# Altium PCB Main.PcbDoc
Units mil, origin at the board's own origin, x right, y up, seen from the top; angles counter-clockwise.
Board outline 3135 x 1700 mil, 2 copper layers (Top Layer, Bottom Layer); 29 components, 19 nets, 145 pads, 1 vias.
Unrouted connection lines stored in the file: 70.
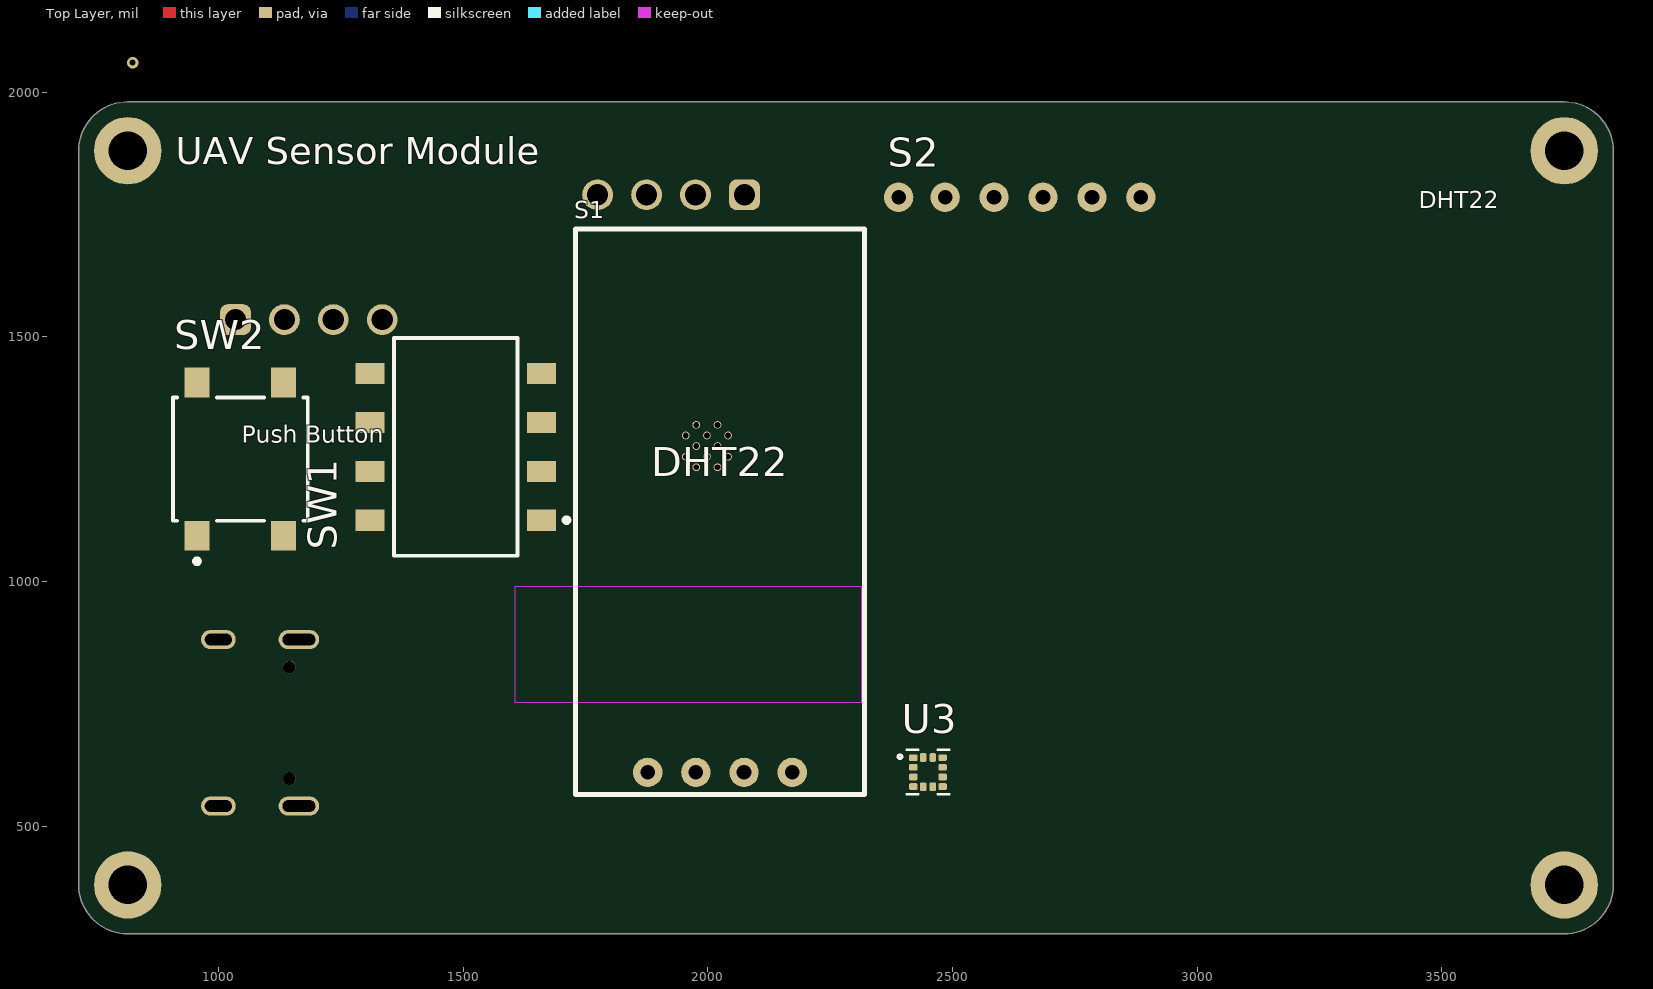
[diagram p0: Top Layer view]
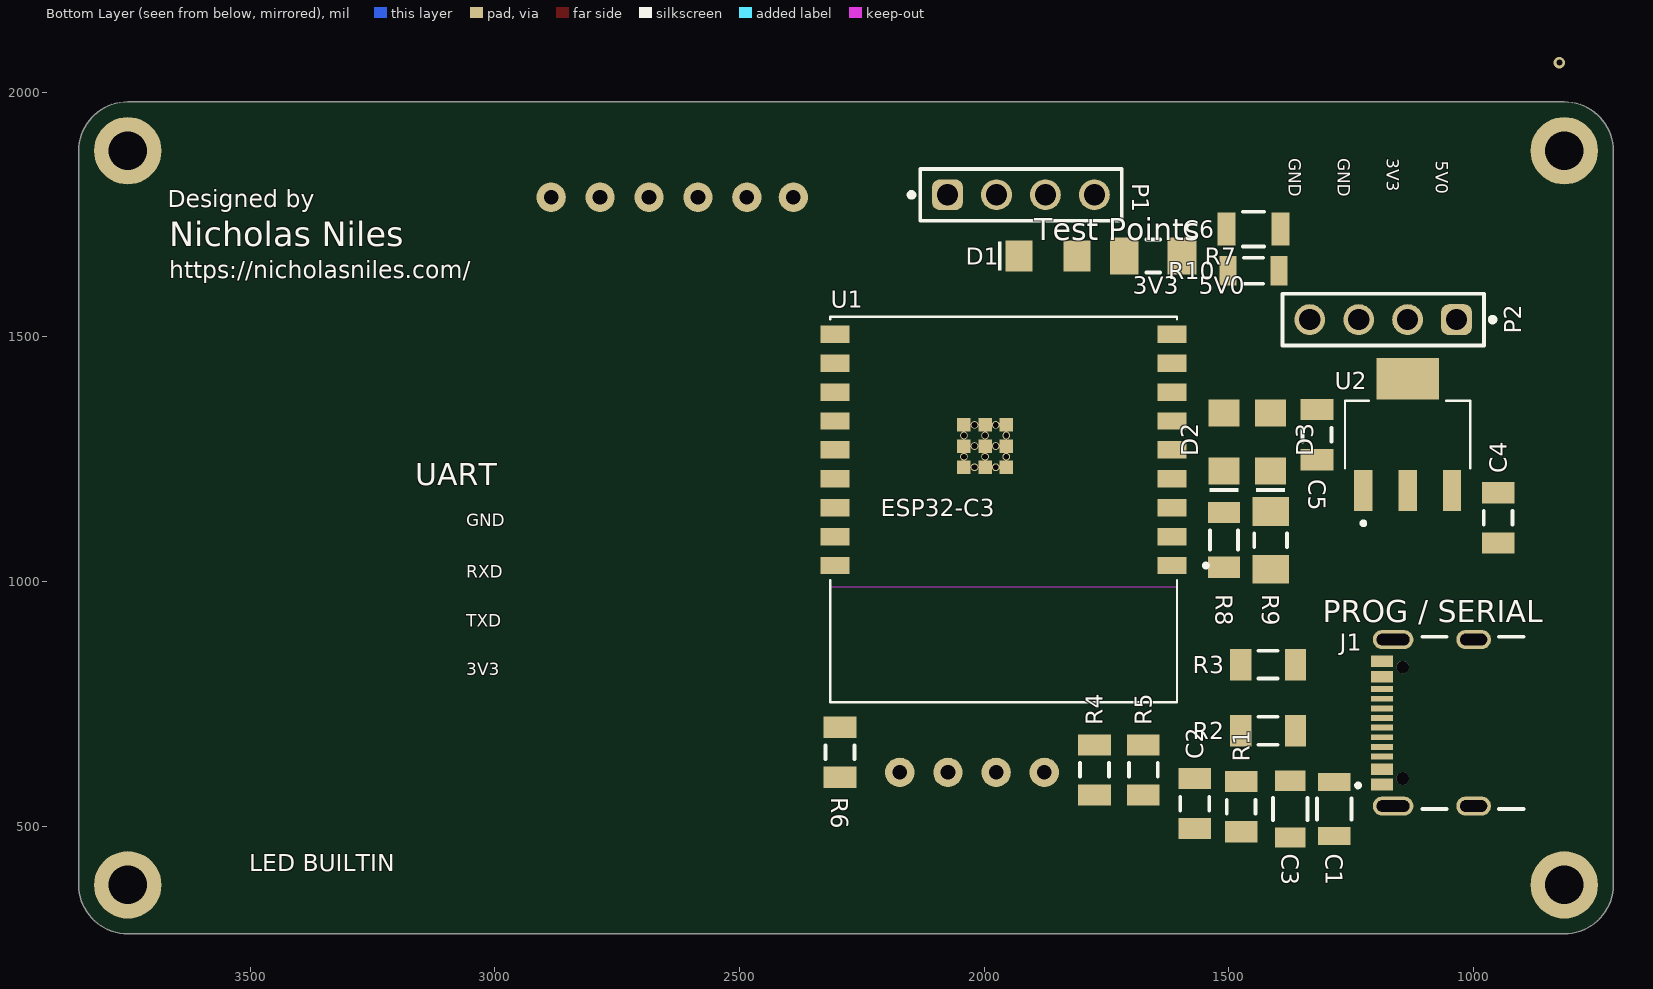
[diagram p1: Bottom Layer view, seen from below]

## Layer stack, top to bottom
Top Solder: solder mask 0.4, Solder Resist, Dk 3.5
Top Layer: signal copper 1.4
Dielectric 1: dielectric 12.6, FR-4, Dk 4.8
Bottom Layer: signal copper 1.4
Bottom Solder: solder mask 0.4, Solder Resist, Dk 3.5

## Board outline
715,380 715,1880 cw(c815,1880) 815,1980 3750,1980 cw(c3750,1880) 3850,1880 3850,380 cw(c3750,380) 3750,280 815,280 cw(c815,380)

## Design rules (kind name [scope] priority, off if disabled: settings)
BoardOutlineClearance [All] p1: gap=7.87 ignorepadtopadclearanceinfootprint=FALSE
Clearance [All] p1: gap=5 ignorepadtopadclearanceinfootprint=TRUE except(10: Arc-Hole Track-Hole SMDPad-Hole THPad-Hole Via-Hole Fill-Hole Poly-Hole Region-Hole Text-Hole)
ComponentClearance [All] p1: gap=5 collisioncheckmode=3 verticalgap=5 showdistances=TRUE
DiffPairsRouting [All] p1: maxlimit=10 minlimit=5 mostfreqgap=5 toplayer_minwidth=5 toplayer_maxwidth=1000 toplayer_prefwidth=5 bottomlayer_minwidth=5 bottomlayer_maxwidth=1000 bottomlayer_prefwidth=5 maxuncoupledlength=500
Height [All] p1: minheight=0 maxheight=71497.94 prefheight=500
HoleSize [All] p1: absolutevalues=TRUE maxlimit=248.03 minlimit=11.81 maxpercent=80.000 minpercent=20.000
HoleToHoleClearance [All] p1: gap=10 allowstackedmicrovias=FALSE
MinimumAnnularRing [All] p1: minimumring=6
MinimumSolderMaskSliver [All] p1: minsoldermaskwidth=6
PlaneClearance [All] p1: clearance=5
PlaneConnect PlaneConnectPowerPads [InPadClass('PowerPads')] p1: planeconnectstyle=Direct reliefexpansion=20 reliefentries=4 reliefconductorwidth=10 reliefairgap=10
PlaneConnect [All] p2: pad.planeconnectstyle=Relief pad.reliefexpansion=11.81 pad.reliefentries=4 pad.reliefconductorwidth=5 pad.reliefairgap=5 via.planeconnectstyle=Direct via.reliefexpansion=11.81 via.reliefentries=4 via.reliefconductorwidth=5 via.reliefairgap=5
PolygonConnect PolygonConnectPowerPads [All vs (InPadClass('PowerPads'))] p1: connectstyle=Direct reliefconductorwidth=10 reliefentries=4 polygonreliefangle="90 Angle" airgapwidth=10
PolygonConnect [All] p2: thpad.connectstyle=Relief thpad.reliefconductorwidth=5 thpad.reliefentries=4 thpad.polygonreliefangle="90 Angle" thpad.airgapwidth=5 smdpad.connectstyle=Relief smdpad.reliefconductorwidth=5 smdpad.reliefentries=4 smdpad.polygonreliefangle="90 Angle" smdpad.airgapwidth=5 via.connectstyle=Direct via.reliefconductorwidth=5 via.reliefentries=4 via.polygonreliefangle="90 Angle" via.airgapwidth=5
RoutingVias [All] p1: holewidth=11.81 width=23.62 viastyle="Through Hole" minholewidth=11.81 minwidth=23.62 maxholewidth=23.62 maxwidth=259.84
SilkToSilkClearance [All] p1: silktosilkclearance=5
SilkToSolderMaskClearance [IsPad] p1: minsilkscreentomaskgap=5 clearancetoexposedcopper=TRUE
SolderMaskExpansion [All] p1: expansion=2 istentingtop=FALSE
SupplyNets "Schematic Supply Nets_2" [InNet('GND')] p1: voltage=0.000
SupplyNets "Schematic Supply Nets_1" [InNet('5V0')] p2: voltage=0.000
SupplyNets "Schematic Supply Nets" [InNet('3V3')] p3: voltage=0.000
UnRoutedNet [All] p1: checkbadconnections=TRUE
Width Width_10mil [All] p1: maxlimit=1000 minlimit=10 preferedwidth=10 minimp=50.000000 maximp=50.000000 favimp=50.000000
Width Width_6mil [All] p2: maxlimit=1000 minlimit=6 preferedwidth=6 minimp=50.000000 maximp=50.000000 favimp=50.000000
Width Power_20mil [All] p3: maxlimit=1000 minlimit=20 preferedwidth=20 minimp=50.000000 maximp=50.000000 favimp=50.000000
Width Power_12mil [All] p4: maxlimit=1000 minlimit=12 preferedwidth=12 minimp=50.000000 maximp=50.000000 favimp=50.000000
Width Width_5mil [All] p5: maxlimit=1000 minlimit=5 preferedwidth=5 minimp=50.000000 maximp=50.000000 favimp=50.000000
19 further rules are at their usual default settings.

## Components (designator, comment, footprint, x,y, rotation, side; value= is the part's Value field where it differs from the comment)
C1 "0.1µF" FP-C1206C-EB-MFG 1285,535 r270 bottom value="0.10 μF"
C2 "1µF" CAPC3216X110X50LL20T25 1570,546.18 r270 bottom
C3 "10µF" FP-GRM31C-0_2-e0_3_0_8-MFG 1375,535 r270 bottom
C4 "1µF" CAPC3216X110X50LL20T25 950,1130 r90 bottom
C5 "1µF" CAPC3216X110X50LL20T25 1320,1300 r90 bottom
C6 "0.1µF" FP-C1206C-EB-MFG 1450,1720 r180 bottom value="0.10 μF"
D1 "150120SS75000" WL-SMCW_1206_150120xx75000 1870,1665 r180 bottom
D2 "150120GS75000" WL-SMCW_1206_150120xx75000 1510,1285 r90 bottom
D3 "150120GS75000" WL-SMCW_1206_150120xx75000 1415,1285 r90 bottom
J1 "USB4105-GF-A" GCT_USB4105-GF-A 1000.12,711.22 r90 bottom
P1 "61300411121" 61300411121 1925,1790 r180 bottom
P2 "61300411121" 61300411121 1185,1535 r0 bottom
R1 "10kΩ" RESC3216X70X50LL20T25 1475,540 r270 bottom
R2 "5.1kΩ" RESC3216X70X50NL05T20 1420,695 r180 bottom
R3 "5.1kΩ" RESC3216X70X50NL05T20 1420,830 r0 bottom
R4 "10kΩ" RESC3216X70X50LL20T25 1775,615 r90 bottom
R5 "10kΩ" RESC3216X70X50LL20T25 1675,615 r90 bottom
R6 "10kΩ" RESC3216X70X50LL20T25 2295,651.18 r270 bottom
R7 "220Ω" RESC3216X70X50ML20T25 1655,1665 r0 bottom
R8 "330Ω" RESC3216X70X50NL05T20 1510,1085 r270 bottom
R9 "220Ω" RESC3216X70X50ML20T25 1415,1084.06 r270 bottom
R10 "4.7k" RESC3216X70X50LL05T20 1450,1635 r180 bottom
S1 "DHT22" DHT22_Footprint 2025,610 r0 top
S2 "Altimeter" altimeter_footprint 2685,1785 r180 top
SW1 "A6S-4102-PH" FP-A6S-4102-PH-MFG 1485,1275 r90 top
SW2 "B3S-1000P" FP-B3S-1000P-MFG 1045,1250 r90 top
U1 "ESP32-C3-WROOM-02-N4" MODULE_ESP32-C3-WROOM-02-H4 1960.51,1146.77 r0 bottom
U2 "TLV1117LV33DCYR" VREG_TLV1117LV33DCYR 1135,1300 r90 bottom
U3 "LIS2HH12TR" PQFN50P200X200X100-12N 2449.92,610.47 r0 top

## Footprints (in the part's own frame and the unit in brackets; to place one, negate y for a bottom-side part, rotate by r counter-clockwise, add the part's x,y. Pads: shape width x height; smd on the part's side, far side on the other; paste and mask are expansions set on the pad)
61300411121 [mm] "Pin Header, pitch 2.54 mm, THT, Vertical, single row, 4p"
  rrect50% 1.6x1.6 hole 1.1: 1(-3.81,0)
  round 1.6 hole 1.1: 2(-1.27,0) 3(1.27,0) 4(3.81,0)
  silkscreen extent -5.8,-1.35 5.23,1.35, body extent -5.08,-1.27 5.08,1.27, height 8.57
altimeter_footprint [mil]
  round 60 hole 30: 1(-200,0) 2(-100,0) 3(0,0) 4(100,0) 5(200,0) 6(295,0)
CAPC3216X110X50LL20T25 [mm] "Chip Capacitor, 2-Leads, Body 3.20x1.60mm, IPC High Density"
  rect 1.1x1.7 smd: 1(-1.3,0) 2(1.3,0)
  silkscreen extent -0.35,-0.75 0.35,0.75, body extent -1.7,-0.9 1.7,0.9, height 1.1
DHT22_Footprint [mil]
  round 60 hole 30: 1(-147.64,0) 2(-49.21,0) 3(49.21,0) 4(147.64,0)
  silkscreen extent -295,-45 295,1111, body extent -297,122 297,1110, height 303
FP-A6S-4102-PH-MFG [mm]
  rect 1.1x1.5 smd paste+0 mask+0: 1(-3.81,-4.45) 2(-1.27,-4.45) 3(1.27,-4.45) 4(3.81,-4.45) 5(3.81,4.45) 6(1.27,4.45) 7(-1.27,4.45) 8(-3.81,4.45)
  silkscreen extent -5.65,-5.88 5.65,3.2, body extent -5.75,-5.3 5.75,5.3, height 0.25
FP-B3S-1000P-MFG [mm]
  rect 1.55x1.3 smd paste+0 mask+0: 1(-3.975,2.25) 2(3.975,2.25) 3(-3.975,-2.25) 4(3.975,-2.25)
  silkscreen extent -5.42,-3.5 3.2,3.5, body extent -4.85,-3.6 4.85,3.6, height 0.25
FP-C1206C-EB-MFG [mm]
  rect 0.95x1.7 smd paste+0 mask+0: 1(-1.4,0) 2(1.4,0)
  silkscreen extent -0.55,-0.9 0.55,0.9, body extent -1.6,-0.8 1.6,0.8, height 0.88
FP-GRM31C-0_2-e0_3_0_8-MFG [mm]
  rect 1.05x1.6 smd paste+0 mask+0: 1(-1.475,0) 2(1.475,0)
  silkscreen extent -0.58,-0.9 0.58,0.9, body extent -1.6,-0.8 1.6,0.8, height 1.8
GCT_USB4105-GF-A [mm]
  rect 0.6x1.15 smd mask+0.05: A1_B12(-3.2,4.755) A4_B9(-2.4,4.755) B1_A12(3.2,4.755) B4_A9(2.4,4.755)
  rect 0.3x1.15 smd mask+0.05: A5(-1.25,4.755) A6(-0.25,4.755) A7(0.25,4.755) A8(1.25,4.755) B5(1.75,4.755) B6(0.75,4.755) B7(-0.75,4.755) B8(-1.75,4.755)
  oval 1x2.1 hole 0.6 slot 1.7 at 90 deg: SH1(-4.32,4.18) SH2(4.32,4.18)
  oval 1x1.8 hole 0.6 slot 1.4 at 90 deg: SH3(-4.32,0) SH4(4.32,0)
  round 0.65 hole 0.65 unplated: ""(-2.89,3.68) ""(2.89,3.68)
  silkscreen extent -4.47,-2.6 4.47,6.1
MODULE_ESP32-C3-WROOM-02-H4 [mm]
  rect 1.5x0.9 smd: 1(-8.75,2.9) 2(-8.75,1.4) 3(-8.75,-0.1) 4(-8.75,-1.6) 5(-8.75,-3.1) 6(-8.75,-4.6) 7(-8.75,-6.1) 8(-8.75,-7.6) 9(-8.75,-9.1) 10(8.75,-9.1) 11(8.75,-7.6) 12(8.75,-6.1) 13(8.75,-4.6) 14(8.75,-3.1) 15(8.75,-1.6) 16(8.75,-0.1) 17(8.75,1.4) 18(8.75,2.9)
  rect 0.7x0.7 smd: 19(-0.14,-2.2) 20(0.96,-2.2) 21(2.06,-2.2) 22(-0.14,-3.3) 23(0.96,-3.3) 24(2.06,-3.3) 25(-0.14,-4.4) 26(0.96,-4.4) 27(2.06,-4.4)
  round 0.4 hole 0.3 mask+0: 28(0.41,-2.2) 29(1.51,-2.2) 30(-0.14,-2.75) 31(0.96,-2.75) 32(2.06,-2.75) 33(0.41,-3.3) 34(1.51,-3.3) 35(-0.14,-3.85) 36(0.96,-3.85) 37(2.06,-3.85) 38(0.41,-4.4) 39(1.51,-4.4)
  Keep-Out Layer region: 9,4 -9,4 -9,10 9,10
  Keep-Out Layer region: 9,4 -9,4 -9,10 9,10
  silkscreen extent -10.6,-10 9,10, body extent -9,-10 9,10, height 3.35
PQFN50P200X200X100-12N [mm]
  rrect50% 0.45x0.35 smd: 1(-0.76,0.75) 2(-0.76,0.25) 3(-0.76,-0.25) 4(-0.76,-0.75) 7(0.76,-0.75) 8(0.76,-0.25) 9(0.76,0.25) 10(0.76,0.75)
  rrect50% 0.35x0.45 smd: 5(-0.25,-0.76) 6(0.25,-0.76) 11(0.25,0.76) 12(-0.25,0.76)
  silkscreen extent -1.55,-1.15 1.1,1.15
RESC3216X70X50LL05T20 [mm] "Chip Resistor, 2-Leads, Body 3.20x1.60mm, IPC High Density"
  rect 0.9x1.55 smd: 1(-1.325,0) 2(1.325,0)
  silkscreen extent -0.5,-0.67 0.5,0.67, body extent -1.63,-0.82 1.62,0.82, height 0.7
RESC3216X70X50LL20T25 [mm] "Chip Resistor, 2-Leads, Body 3.20x1.60mm, IPC High Density"
  rect 1.1x1.7 smd: 1(-1.3,0) 2(1.3,0)
  silkscreen extent -0.35,-0.75 0.35,0.75, body extent -1.7,-0.9 1.7,0.9, height 0.7
RESC3216X70X50ML20T25 [mm] "Chip Resistor, 2-Leads, Body 3.20x1.60mm, IPC Low Density"
  rect 1.5x1.9 smd: 1(-1.5,0) 2(1.5,0)
  silkscreen extent -0.35,-0.85 0.35,0.85, body extent -1.7,-0.9 1.7,0.9, height 0.7
RESC3216X70X50NL05T20 [mm] "Chip Resistor, 2-Leads, Body 3.20x1.60mm, IPC Medium Density"
  rect 1.1x1.65 smd: 1(-1.425,0) 2(1.425,0)
  silkscreen extent -0.5,-0.72 0.5,0.72, body extent -1.63,-0.82 1.62,0.82, height 0.7
VREG_TLV1117LV33DCYR [mm]
  rect 2.15x0.95 smd: 1(-2.9,2.3) 2(-2.9,0) 3(-2.9,-2.3)
  rect 2.15x3.25 smd: 4(2.9,0)
  silkscreen extent -4.7,-3.25 1.75,3.25, body extent -3.5,-3.25 3.5,3.25, height 1.8
WL-SMCW_1206_150120xx75000 [mm] "SMD Mono-color Chip LED, body 3.2x1.6mm"
  rect 1.4x1.6 smd: 1(-1.5,0) 2(1.5,0)
  silkscreen extent -2.6,-0.75 -2.4,0.75, body extent -1.6,-0.8 1.6,0.8, height 0.68

## Part data
C1 C6: library part CMP-03020-000153-1, "CAP CER 0.1UF 100V X7R 1206", Capacitance="0.10 μF", Manufacturer=KEMET, Manufacturer Part Number=C1206C104K1RACTU, Package=C1206C-EB, Temperature="-55°C to +150°C", Temperature Characteristic=X7R, Temperature Coefficient=15%, Temperature Range High=+150°C, Temperature Range Low=-55°C, Tolerance=0.1, Voltage Rating="100 V", Automotive=Yes, Automotive Grade="Grade 0", Category=Cap, ComponentLink2Description=Datasheet, ComponentLink2URL=https://content.kemet.com/datasheets/KEM_C1007_X8R_ULTRA_150C_SMD.pdf, Device Class L1="Passive Components", Device Class L2=Capacitors, Device Class L3="Ceramic Capacitors", Digikey Description="CAP CER 0.1UF 100V X7R 1206", Height=0.88mm, Ipc Land Pattern Name=CAPC320160X78, Lead Free=Yes, Material=Ceramic, Mouser Description="CAP CER 0.1UF 100V X7R 1206", Octopart=https://octopart.com/c1206c104k1ractu-kemet-89521, RoHS=TRUE
C2 C4 C5: library part CMP-2000-06011-1, "Chip Capacitor, 1 uF, +/- 10%, 50 V, -55 to 125 degC, 1206 (3216 Metric), RoHS, Tape and Reel", Capacitance=1uF, Capacitance - nF=1000nF, Case Code - in=1206, Case Code - mm=3216, Case Height=1mm, Case Length=3.2mm, Case Width=1.6mm, Dielectric=X7R, Manufacturer=Kemet, Maximum Operating Temperature=+125C, Minimum Operating Temperature=-55C, Operating Temperature Range=-55Cto+125C, Package / Case=1206(3216metric), Package Description="2-Pin Surface Mount Device, Body 3.2 x 1.6 mm", Temperature Coefficient / Code=+/-15%, Tolerance=10%, Voltage Rating=50V, Brand=Kemet, Class=Class1, Datasheet URL=http://www.kemet.com/docfinder?Partnumber=C1206C105K5RACTU, Datasheet Version=02/2016, Dimensions=1.6mmWx3.2mmLx1mmH, Factory Pack Quantity=2500, Manufacturer URL=http://www.kemet.com/, Mounting Technology=SurfaceMount, Package Reference=1206, Packaging=Reel, Product=GeneralTypeMLCCs, Product Category=MultilayerCeramicCapacitorsMLCC-SMD/SMT, RoHS=Details, Series=C1206C, Termination Style=SMD/SMT, Type=SMDMLCCX7R6.3-250VDCCommericalGrade, Voltage Rating DC=50V
C3: library part CMP-06035-003589-1, "Chip Multilayer Ceramic Capacitors for General Purpose, 1206, 10uF, X7R, 15%, 10%, 25V", Capacitance=10uF, Case Code (Imperial)=1206, Case Code (Metric)=3216, Dielectric=X7R, Max Operating Temperature=125°C, Min Operating Temperature=-55°C, Package Quantity=1, Tolerance=10%, Voltage=25V, Case/Package=1206, Depth=1.6mm, Height=1.6mm, Lead Free="Lead Free", Length=3.2mm, Material=Ceramic, Mount="Surface Mount", Number of Pins=2, Packaging="Tape and Reel", Radiation Hardening=No, REACH SVHC="No SVHC", Termination=SMD/SMT, Thickness=0.071inch, Voltage Rating=25V, Voltage Rating (DC)=25V, Width=1.6mm
D1: library part CMP-1426-00017-3, "Led, Red, 630 Nm, 1.9 V, 30 Ma, 60 Mcd Rohs Compliant: Yes", Case Code (Imperial)=1206, Case Code (Metric)=3216, Color=Red, Forward Current=100mA, Forward Voltage=1.9V, Max Operating Temperature=85°C, Max Reverse Voltage (DC)=5V, Min Operating Temperature=-40°C, Test Current=20mA, Case/Package=1206, Dominant Wavelength=630nm, Height=680µm, Length=3.2mm, Lens Style="Clear, Rectangular", Luminous Intensity=60mcd, Mount="Surface Mount", Packaging="Tape and Reel", Peak Wavelength=645nm, REACH SVHC=Unknown, RoHS=Compliant, Viewing Angle=140°, Wavelength=630nm, Width=1.6mm
D2 D3: library part CMP-1426-00014-4, "WL-SMCW SMT Mono-Color Chip LED Waterclear", Case Code (Imperial)=1206, Case Code (Metric)=3216, Color=Green, Forward Current=100mA, Forward Voltage=3.2V, Max Junction Temperature (Tj)=95°C, Max Operating Temperature=85°C, Max Reverse Voltage (DC)=5V, Min Operating Temperature=-40°C, Power Dissipation=105mW, Test Current=20mA, Case/Package=1206, Dominant Wavelength=525nm, Height=680µm, Length=3.2mm, Lens Style="Clear, Rectangular", Luminous Intensity=450mcd, Mount="Surface Mount", Packaging="Tape and Reel", Peak Wavelength=515nm, REACH SVHC=Unknown, Reverse Voltage=5V, RoHS=Compliant, Viewing Angle=140°, Wavelength=525nm, Width=1.6mm
J1: Package=None, Availability=Unavailable, MF="{'manufacturer': u'GCT'}", MP=USB4105-GF-A, Price=None
P1 P2: "WR-PHD Pin Header, THT, Vertical, pitch 2.54mm, 1 Row, 4P", Contact Resistance=20mOhm, Manufacturer="Wurth Elektronik", Operating Temperature Max=105°C, Operating Temperature Min=-40°C, Rated Current=3A, Withstanding Voltage=500V, Working Voltage=250V, Category="Board-to-Board Connectors", ComponentLink1Description="Website Link", ComponentLink1URL=https://www.we-online.com/redexpert/article/61300411121?ad, ComponentLink2Description="Datasheet Link", ComponentLink2URL=https://www.we-online.com/redexpert/spec/61300411121?ad, Gender="Pin Header", Manufacturer Part Number=61300411121, Match Code=WR-PHD, Mount="Through Hole", Number of Pins=4, Number of Rows=1, Orientation=Vertical, Packaging=Bag, Pitch=2.54mm
R1 R4 R5 R6: library part CMP-2003-04407-1, Manufacturer=Panasonic, Part Number=ERA8AEB103V
R2 R3: library part CMP-2003-00853-1, Manufacturer=Panasonic, Part Number=ERJ-8ENF5101V
R7 R9: library part CMP-2003-04438-1, Manufacturer=Panasonic, Part Number=ERA8AEB221V
R8: library part CMP-2003-00612-1, Manufacturer=Panasonic, Part Number=ERJ-8GEYJ331V
R10: library part CMP-2003-00848-1, Manufacturer=Panasonic, Part Number=ERJ8ENF4701V
S1: "DHT22 Sensor"
SW1: library part CMP-08827-000008-1, "SWITCH SLIDE DIP SPST 25MA 24V", Case/Package=DIP, Contact Resistance=200mR, Current Rating=25mA, Max Operating Temperature=70°C, Max Voltage Rating (DC)=24V, Min Operating Temperature=-20°C, Package Quantity=900, Actuator Length=0mm, Actuator Type="Slide (Standard)", Contact Plating=Gold, Electrical Life=1000Cycles, Length=0.437inch, Max Current Rating=25mA, Mechanical Life=1000Cycles, Mount="Surface Mount", Number of Positions=4, Orientation=Straight, Packaging="Tape and Reel", Pitch=0.1inch, RoHS Compliant=Yes, Series=A6S-H, Terminal Pitch=2.54mm, Termination="Gull Wing", Throw Configuration=SPST, Voltage Rating (DC)=24V, Washable=Yes, Weight=0.41g
SW2: library part CMP-08834-000008-1, "SWITCH TACTILE SPST-NO 0.05A 24V", Contact Current Rating=50mA, Contact Resistance=100mR, Max Operating Temperature=70°C, Max Voltage Rating (DC)=24V, Min Operating Temperature=-25°C, Operating Force=1.57N, Package Quantity=1, Ratings=IP67, Actuator Length=0.8mm, Actuator Type=Standard, Contact Material=Bronze, Contact Plating=Silver, Current Rating=50mA, Depth=9mm, Electrical Life=500000Cycles, Height=3.65mm, Illumination Type=Non-Illuminated, Lead Free="Lead Free", Length=6.6mm, Max Current Rating=50mA, Mechanical Life=500000Cycles, Mount="Surface Mount", Number of Poles=1, Orientation=Straight, Packaging="Tape and Reel", Radiation Hardening=No, REACH SVHC="No SVHC", Switch Function=Off-Mom, Switch Travel=0.25mm, Termination="Gull Wing", Throw Configuration=SPST, Voltage Rating (DC)=24V, Weight=0.010582oz, Width=6mm
U1: "WiFi Modules (802.11) (Engineering Samples) SMD module, ESP32-C3, 4MB SPI flash, PCB antenna, -40 C +85 C", Package=Package, Availability="In Stock", Check_prices=https://www.snapeda.com/parts/ESP32-C3-WROOM-02-N4/Espressif+Systems/view-part/?ref=eda, MF="Espressif Systems", MP=ESP32-C3-WROOM-02-N4, Price=None, Purchase-URL=https://pricing.snapeda.com/search/part/ESP32-C3-WROOM-02-N4/?ref=eda, SnapEDA_Link=https://www.snapeda.com/parts/ESP32-C3-WROOM-02-N4/Espressif+Systems/view-part/?ref=snap
U2: "1-A, low-dropout voltage regulator", Package="SOT-223-4 Texas Instruments", Check_prices=https://www.snapeda.com/parts/TLV1117LV33DCYR/Texas+Instruments/view-part/?ref=eda, Digi-Key_Part_Number=296-28778-2-ND, MF="Texas Instruments", MP=TLV1117LV33DCYR, Purchase-URL=https://pricing.snapeda.com/search/part/TLV1117LV33DCYR/?ref=eda, SnapEDA_Link=https://www.snapeda.com/parts/TLV1117LV33DCYR/Texas+Instruments/view-part/?ref=snap
U3: "Accelerometer X, Y, Z Axis Â±2g, 4g, 8g 5Hz ~ 400Hz 12-LGA _2x2_", Package="LGA-12 STMicroelectronics", Availability=Unavailable, MF=STMicroelectronics, MP=LIS2HH12TR, Price=None, SnapEDA_Link=https://www.snapeda.com/parts/LIS2HH12TR/STMicroelectronics/view-part/552242/?ref=snap

## Free pads (board coordinates)
  round 137.79 hole 78.74: 7(815,380) 7(815,1880) 7(3750,380) 7(3750,1880)

## Via types
v1: diameter 24, hole 12, Top Layer to Bottom Layer, tented both sides, 1 vias

## Nets (pads, with @x,y where several pads share a name; then routed paths per layer and width w, separated by ;. In a path a pad name is that pad's centre, name@x,y a point inside that pad or via, vN(x,y) a via of type N, cw(c..) or ccw(c..) an arc to the next point about the centre after c; other vN are vias at no path point)
3V3: C1.1 C3.1 C5.2 C6.2 D3.2 P1.1 P2.2 R1.1 R4.2 R5.2 R6.2 R10.2 S1.1 U1.1 U2.2 U2.4
5V0: C4.2 D2.2 J1.A4_B9 J1.B4_A9 P2.1 U2.3
D+: J1.A6 J1.B6 U1.14
D-: J1.A7 J1.B7 U1.13
GND: C1.2 C2.1 C3.2 C4.1 C5.1 C6.1 D1.1 J1.A1_B12 J1.B1_A12 J1.SH1 J1.SH2 J1.SH3 J1.SH4 P1.4 P2.3 P2.4 pad.7 R2.1 R3.2 R8.2 R9.2 S1.4 SW2.3 SW2.4 U1.9 U2.1
IO0: R7.1 U1.18
IO4: SW2.1 SW2.2 U1.3
IO9: R10.1 S1.2 U1.8
  other v1: 825,2060
NetC2_2: C2.2 R1.2 U1.2
NetD1_2: D1.2 R7.2
NetD2_1: D2.1 R8.1
NetD3_1: D3.1 R9.1
NetJ1_A5: J1.A5 R2.2
NetJ1_B5: J1.B5 R3.1
NetR4_1: R4.1 U1.16
NetR5_1: R5.1 U1.15
NetR6_1: R6.1 U1.7
RXD: P1.3 U1.11
TXD: P1.2 U1.12
pads on no net: J1. J1.A8 J1.B8 S1.3 S2.1 S2.2 S2.3 S2.4 S2.5 S2.6 SW1.1 SW1.2 SW1.3 SW1.4 SW1.5 SW1.6 SW1.7 SW1.8 U1.4 U1.5 U1.6 U1.10 U1.17 U1.19 U1.20 U1.21 U1.22 U1.23 U1.24 U1.25 U1.26 U1.27 U1.28 U1.29 U1.30 U1.31 U1.32 U1.33 U1.34 U1.35 U1.36 U1.37 U1.38 U1.39 U3.1 U3.2 U3.3 U3.4 U3.5 U3.6 U3.7 U3.8 U3.9 U3.10 U3.11 U3.12

## Silkscreen, mask and mechanical layers (free items; w line width, h text height)
Top Overlay:
  text "UAV Sensor Module" at 913,1852.51 h55
  text "DHT22" at 3453,1763 h35
  text "Push Button" at 1048,1283 h35
Bottom Overlay:
  text "3V3" at 1177.5,1864.65 h25 r90
  text "GND" at 1277.5,1864.65 h25 r90
  text "GND" at 1377.5,1864.65 h25 r90
  text "5V0" at 1077.5,1859.65 h25 r90
  text "Designed by" at 3668.69,1764.66 h35
  text "Test Points" at 1898,1697 h45
  text "Nicholas Niles" at 3664.89,1685 h50
  text "https://nicholasniles.com/" at 3665.7,1619.66 h35
  text "5V0" at 1562,1588 h35
  text "3V3" at 1697,1588 h35
  text "UART" at 3163,1197 h45
  text "ESP32-C3" at 2212,1133 h35
  text "GND" at 3058.32,1113 h25
  text "RXD" at 3058.32,1008 h25
  text "PROG / SERIAL" at 1308,917 h45
  text "TXD" at 3058.32,908 h25
  text "3V3" at 3058.32,808 h25
  text "LED BUILTIN" at 3502,408 h35

## Text inside footprints (layer, text, board x,y; h text height)
J1: Bottom 3D Body "PCB EDGE" at 901.69,923.82 h16 r270